# EAGLE board ExenMiniLighthouseShield (EAGLE 8.6.3)
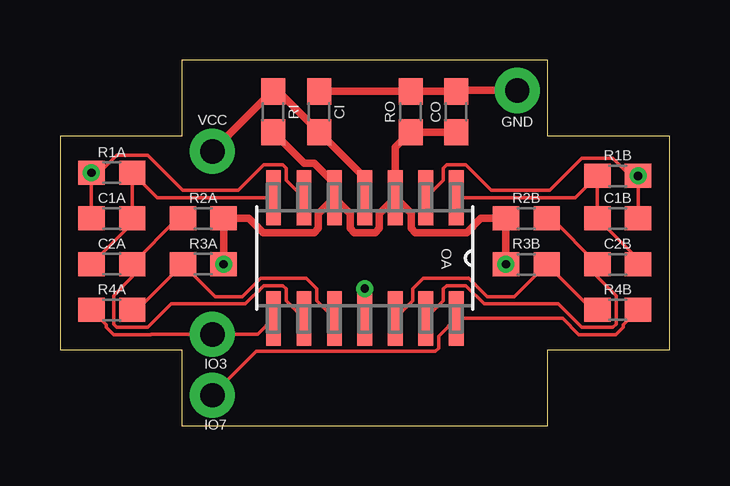
[diagram p0: board, top side]
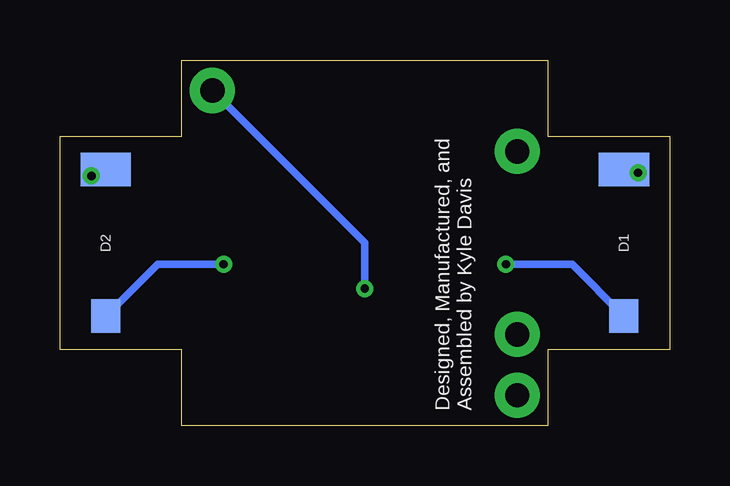
[diagram p1: board, bottom side, seen from below]

Size 25.4 x 15.24 mm. Coordinates in mm from the lower left corner, seen from the top.
Outline: 5.08,0 20.32,0 20.32,3.17 25.4,3.17 25.4,12.06 20.32,12.06 20.32,15.24 5.08,15.24 5.08,12.06 0,12.06 0,3.17 5.08,3.17 5.08,0
Copper layers (1*16): Top 0.0356mm / dielectric 1.5011mm / Bottom 0.0356mm
Design rules "LaenPCBOrder *": minimum track width 6mil, minimum drill 13mil, track to track 6mil, track to pad 6mil, pad to pad 6mil, via to via 6mil, smd to smd 6mil, copper to edge 12mil, drill to drill 6mil, minimum pad ring 7mil, minimum via ring 7mil, stop-mask expansion 3mil, vias tented up to drill 0mil, thermal gap 10mil

## Footprints (pad centres in the part's own frame; a part is rotated, then mirrored left to right if it is on the bottom)
PASSIVE-0603 = smd 1.1 x 1: 1 -0.85,0; 2 0.85,0
0603 = smd 1.1 x 1: 1 -0.85,0; 2 0.85,0
BPW34_BP104_SMD = smd 1.4 x 1.2: ANODE -3.05,0 | smd 1.4 x 2.1: CATHODE 3.05,0
SINGLE-THROUGH-HOLE = drill 1.016 pad 1.88: 1 0,0
1X01_NO_SILK = drill 1.016 pad 1.88: 1 0,0
D14-M = smd 2.286 x 0.61: 1 -2.515,3.81; 2 -2.515,2.54; 3 -2.515,1.27; 4 -2.515,0; 5 -2.515,-1.27; 6 -2.515,-2.54; 7 -2.515,-3.81; 8 2.515,-3.81; 9 2.515,-2.54; 10 2.515,-1.27; 11 2.515,0; 12 2.515,1.27; 13 2.515,2.54; 14 2.515,3.81

## Placement (x,y rotation side)
C1A  2.2pF  [PASSIVE-0603]  2.16,8.64 0 top
C1B  2.2pF  [PASSIVE-0603]  23.24,8.64 180 top
C2A  4.7nF  [PASSIVE-0603]  2.16,6.73 0 top
C2B  4.7nF  [PASSIVE-0603]  23.24,6.73 180 top
CI  100nF  [0603]  10.79,13.08 90 top
CO  100nF  [0603]  16.51,13.08 90 top
D1  PHOTODIODEBPW  [BPW34_BP104_SMD]  1.91,7.62 90 bottom
D2  PHOTODIODEBPW  [BPW34_BP104_SMD]  23.5,7.62 90 bottom
GND  SINGLE-THROUGH-HOLE  [SINGLE-THROUGH-HOLE]  19.05,13.97 0 top
IO3  [1X01_NO_SILK]  6.35,3.81 0 top
IO7  [1X01_NO_SILK]  6.35,1.27 0 top
OA  TLV2464IDM  [D14-M]  12.7,6.99 270 top
R1A  100k  [PASSIVE-0603]  2.16,10.54 0 top
R1B  100k  [PASSIVE-0603]  23.24,10.41 180 top
R2A  18k  [PASSIVE-0603]  5.97,8.64 0 top
R2B  18k  [PASSIVE-0603]  19.43,8.64 180 top
R3A  1K  [PASSIVE-0603]  5.97,6.73 0 top
R3B  1k  [PASSIVE-0603]  19.43,6.73 180 top
R4A  100k  [PASSIVE-0603]  2.16,4.83 180 top
R4B  100k  [PASSIVE-0603]  23.24,4.83 0 top
RI  27k  [0603]  8.89,13.08 90 top
RO  27k  [0603]  14.61,13.08 270 top
VCC  [1X01_NO_SILK]  6.35,11.43 0 top

## Library data of the parts
C1A C1B C2A C2B D1 D2 GND OA R1A R1B R2A R2B R3A R3B R4A R4B = ZippyComponentLibrary
CI CO = SparkFun-Capacitors; PROD_ID: CAP-07880
IO3 IO7 VCC = SparkFun-Connectors
RI RO = SparkFun-Resistors; PROD_ID: RES-07828

## Nets
D1IN: C1B.1 D2.CATHODE OA.2 R1B.1
D1OA2P: C2B.2 OA.13 R2B.1
D1OAOUT1: C1B.2 C2B.1 OA.1 R1B.2
D2IN: C1A.1 D1.CATHODE OA.6 R1A.1
D2OA1OUT: C1A.2 C2A.1 OA.7 R1A.2
D2OA2N: OA.10 R3A.1 R4A.1
D2OA2P: C2A.2 OA.9 R2A.1
GND: CI.2 CO.2 GND.1 OA.11 RO.1
IO3: IO3.1 OA.8 R4A.2
IO7: IO7.1 OA.14 R4B.2
LVCC: CO.1 D1.ANODE D2.ANODE OA.3 OA.5 R2A.2 R2B.2 R3A.2 R3B.2 RI.1 RO.2
N$11: OA.12 R3B.1 R4B.1
VCC: CI.1 OA.4 RI.2 VCC.1

## Tracks (layer width: path | path; a pad name or v marks a point on that pad's centre or on a via)
D1IN  (via drill 0.35)
  Top 0.152: OA.2 15.98,10.24 15.98,10.74 16.11,10.87 16.91,10.87 17.98,9.8 20.41,9.8 21.75,11.14 23.04,11.14 23.76,10.41 R1B.1 C1B.1
  Bottom 0.152: D2.CATHODE 23.75,10.41 R1B.1
  other vias: 24.09,10.41
D1OA2P
  Top 0.152: R2B.1 20.49,8.64 C2B.2 22.39,6.2 23.17,5.42 23.17,4.23 23.04,4.1 21.75,4.1 20.76,5.08 17.67,5.08 16.91,5.84 16.11,5.84 15.98,5.71 15.98,5.21 OA.13
D1OAOUT1
  Top 0.152: OA.1 21.48,9.5 R1B.2 C1B.2 24.09,6.94 C2B.1
D2IN  (via drill 0.35)
  Top 0.152: C1A.1 R1A.1 1.64,10.54 2.36,11.27 3.65,11.27 5.12,9.8 7.42,9.8 8.49,10.87 9.29,10.87 9.42,10.74 9.42,10.24 OA.6
  Bottom 0.152: D1.CATHODE 1.78,10.54 R1A.1
  other vias: 1.31,10.54
D2OA1OUT
  Top 0.152: C2A.1 3.01,8.43 C1A.2 R1A.2 4.05,9.5 OA.7
D2OA2N
  Top 0.152: R4A.1 3.21,4.83 R3A.1 6.46,5.38 7.6,5.38 8.36,6.15 10.26,6.15 10.69,5.71 10.69,5.21 OA.10
D2OA2P
  Top 0.152: R2A.1 4.91,8.64 C2A.2 3.01,6.2 2.23,5.42 2.23,4.23 2.36,4.1 3.65,4.1 4.64,5.08 7.73,5.08 8.49,5.84 9.29,5.84 9.42,5.71 9.42,5.21 OA.9
GND  (via drill 0.35)
  Top 0.305: CI.2 RO.1 CO.2 16.55,13.97 GND.1 | OA.11 v12.7,5.71
  Bottom 0.305: GND.1 12.7,7.62 v12.7,5.71
IO3
  Top 0.152: OA.8 8.23,3.81 IO3.1 3.8,3.81 3.78,3.79 2.24,3.79 1.93,4.11 1.93,4.21 R4A.2
IO7
  Top 0.152: R4B.2 23.47,4.21 23.47,4.11 23.16,3.79 21.62,3.79 20.94,4.47 OA.14 15.77,3.73 15.77,3.23 15.64,3.1 8.18,3.1 IO7.1
LVCC  (via drill 0.35)
  Top 0.305: R3A.2 R2A.2 7.88,8.64 8.46,8.05 10.59,8.05 10.77,8.23 10.77,8.84 OA.5 | OA.5 12.09,8.84 12.09,8.23 12.27,8.05 13.13,8.05 13.31,8.23 13.31,8.84 OA.3 13.97,9.53 | RI.1 10.17,10.95 10.59,10.95 11.43,10.11 OA.5 | CO.1 RO.2 13.97,11.6 13.97,9.53 | R3B.2 R2B.2 17.52,8.64 16.94,8.05 14.81,8.05 14.63,8.23 14.63,8.87 13.97,9.53
  Bottom 0.305: D1.ANODE 4.07,6.73 R3A.2 | D2.ANODE 21.33,6.73 R3B.2
  other vias: 6.82,6.73 18.58,6.73
N$11
  Top 0.152: R4B.1 22.19,4.83 R3B.1 18.93,5.38 17.8,5.38 17.04,6.15 15.14,6.15 14.71,5.71 14.71,5.21 OA.12
VCC
  Top 0.305: VCC.1 8.85,13.93 RI.2 9.1,13.93 CI.1 12.7,10.33 OA.4

## Text on the board
bPlace: Designed, Manufactured, and / Assembled by Kyle Davis